# Altium PCB DC-IN-TH_DC005.pcbdoc
Units mm, origin at the board's own origin, x right, y up, seen from the top; angles counter-clockwise.
Board outline 43.05 x 36.83 mm, 2 copper layers (Top Layer, Bottom Layer); 1 components, 0 nets, 3 pads, 0 vias.
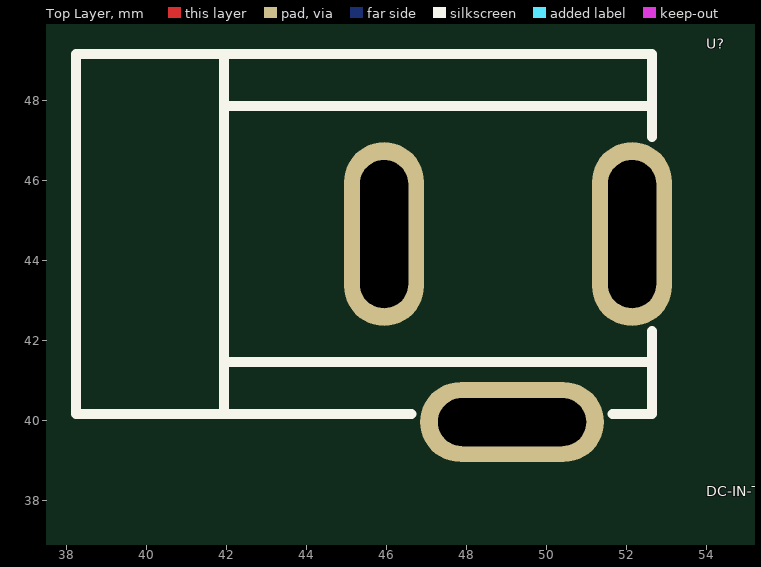
[diagram p0: Top Layer view]
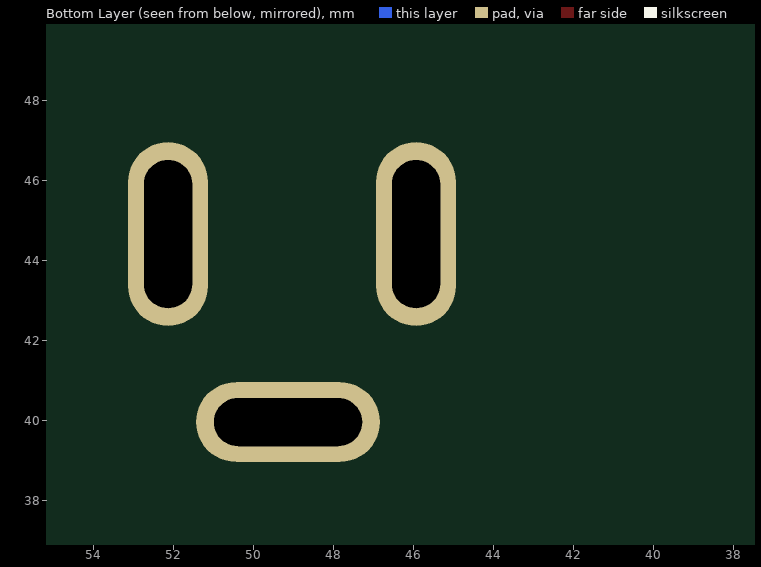
[diagram p1: Bottom Layer view, seen from below]

## Layer stack, top to bottom
Top Layer: signal copper (thickness not stored)
Dielectric: dielectric 0.32, FR-4, Dk 4.8
Bottom Layer: signal copper (thickness not stored)

## Board outline
68.455,25.4 25.4,25.4 25.4,62.231 68.455,62.231

## Components (designator, comment, footprint, x,y, rotation, side; value= is the part's Value field where it differs from the comment)
U? "DC-IN-TH_DC005" DC-IN-TH_DC005 46.038,43.689 r0 top

## Footprints (in the part's own frame and the unit in brackets; to place one, negate y for a bottom-side part, rotate by r counter-clockwise, add the part's x,y. Pads: shape width x height; smd on the part's side, far side on the other; paste and mask are expansions set on the pad)
DC-IN-TH_DC005 [mm]
  oval 2x4.6 hole 1.2 slot 3.7 at 90 deg paste+0 mask+0.051: 1(6.088,0.961) 2(-0.111,0.962)
  oval 4.6x2 hole 1.2 slot 3.7 at 0 deg paste+0 mask+0.051: 3(3.089,-3.739)
  silkscreen extent -7.81,-3.54 6.59,5.46

## Nets (pads, with @x,y where several pads share a name; then routed paths per layer and width w, separated by ;. In a path a pad name is that pad's centre, name@x,y a point inside that pad or via, vN(x,y) a via of type N, cw(c..) or ccw(c..) an arc to the next point about the centre after c; other vN are vias at no path point)
pads on no net: U?.1 U?.2 U?.3